# Altium PCB display-board.PcbDoc
Units mm, origin at the board's own origin, x right, y up, seen from the top; angles counter-clockwise.
Board outline 43.74 x 11.2 mm, 4 copper layers (Top Layer, Int1 (GND), Int2 (PWR), Bottom Layer), stack 1.369 mm thick; 12 components, 18 nets, 89 pads, 61 vias.
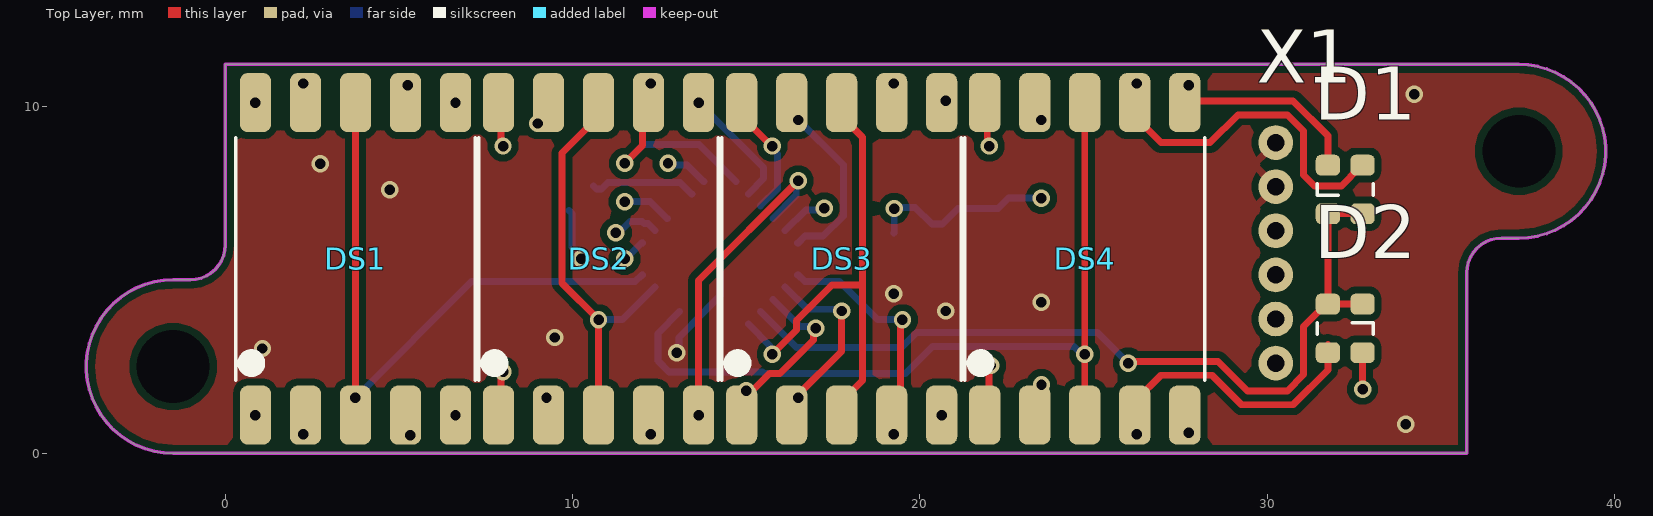
[diagram p0: Top Layer view]
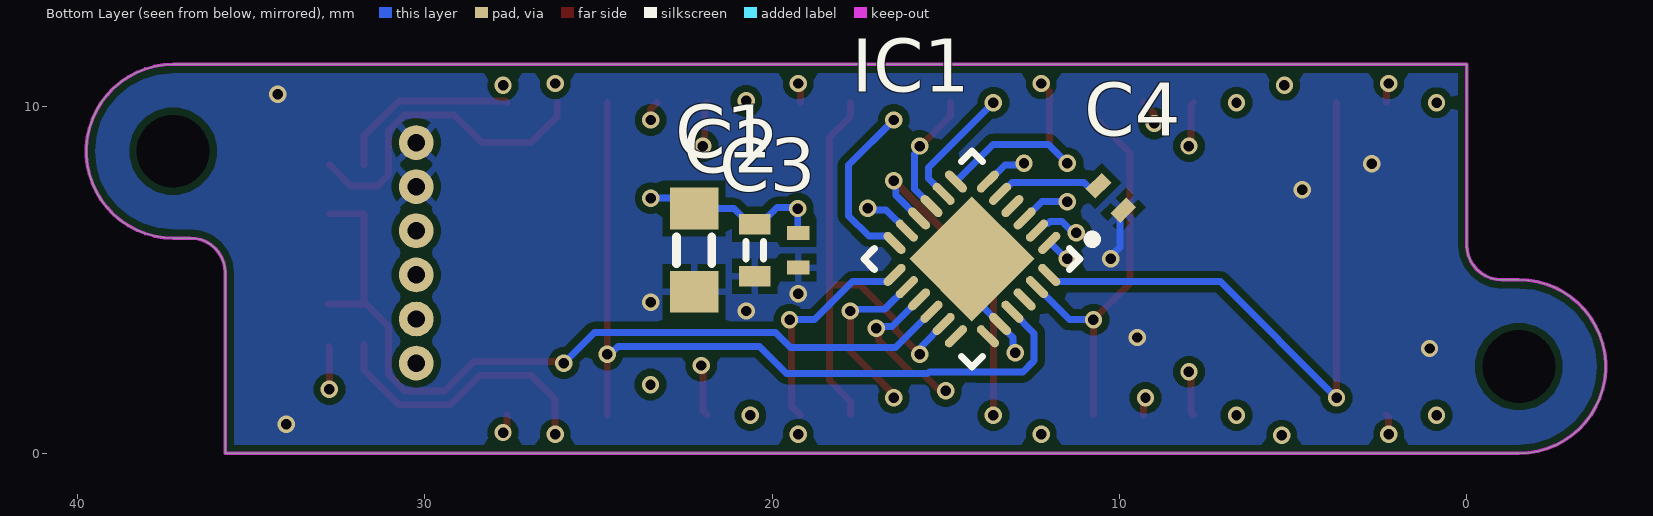
[diagram p1: Bottom Layer view, seen from below]
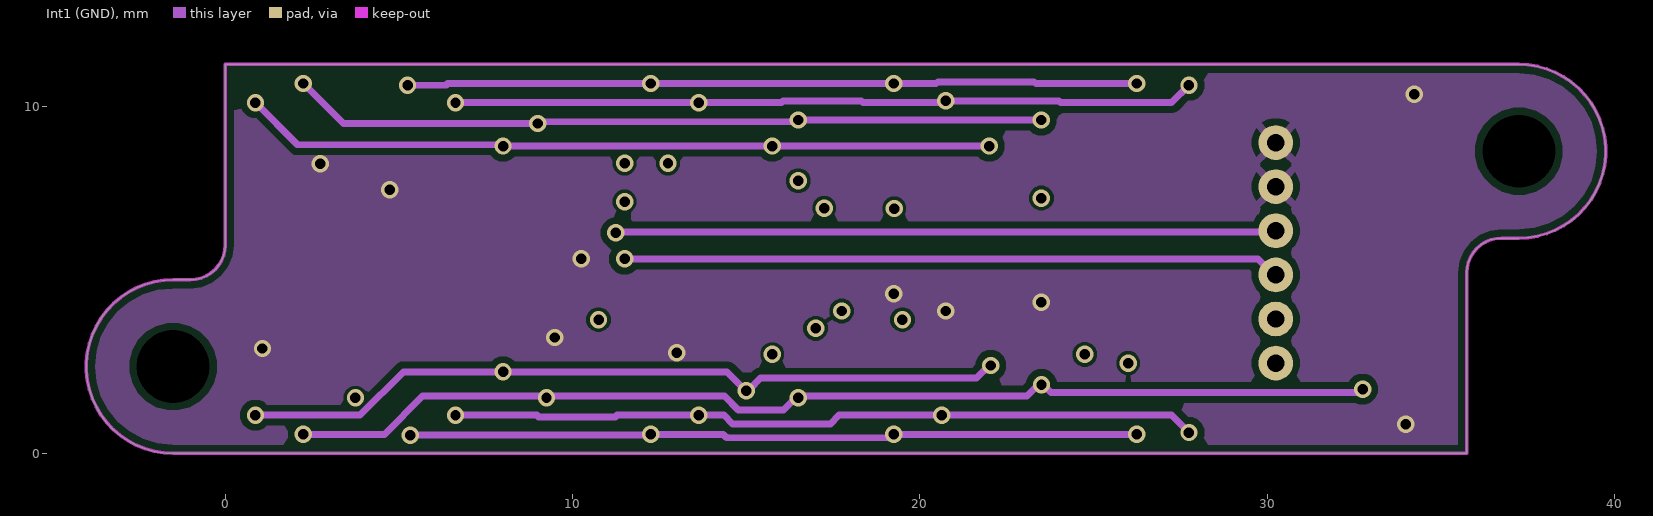
[diagram p2: Int1 (GND)]
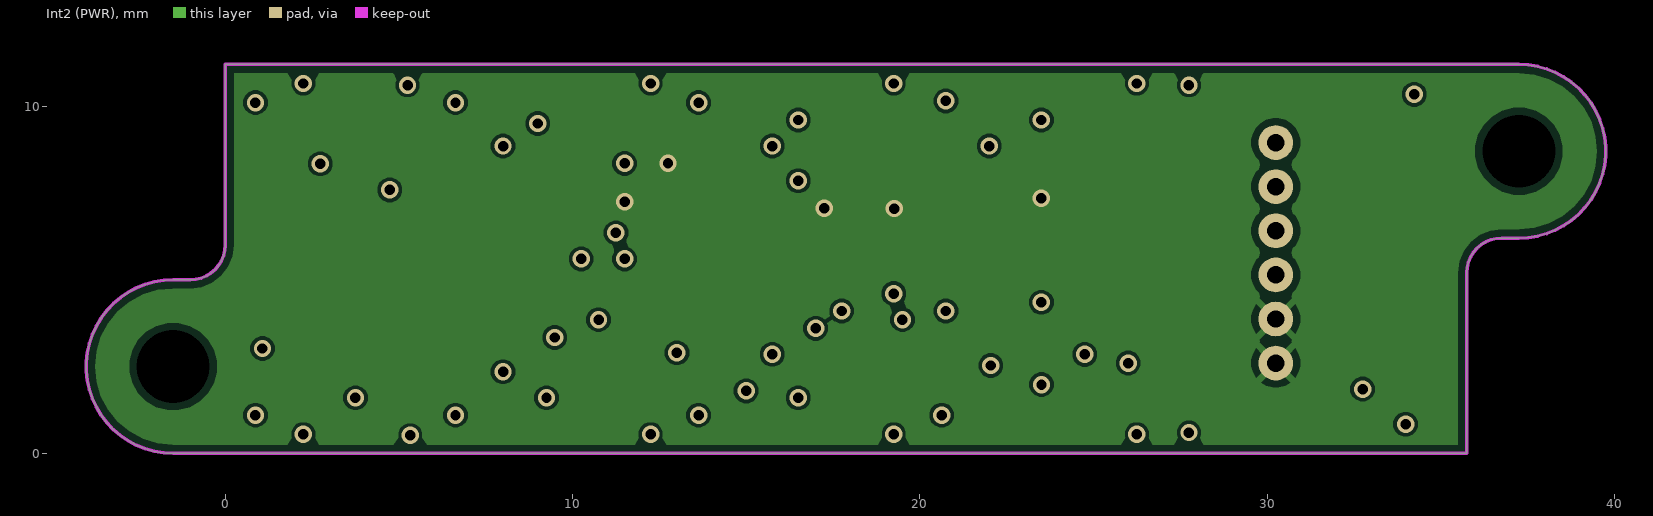
[diagram p3: Int2 (PWR)]
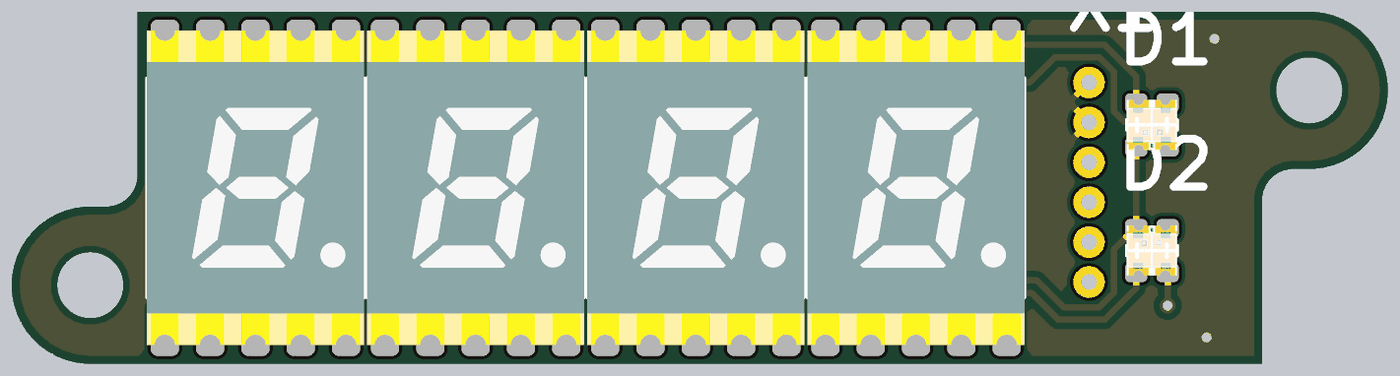
[diagram p4: 3D render of the assembled board from above, using the file's embedded part models]
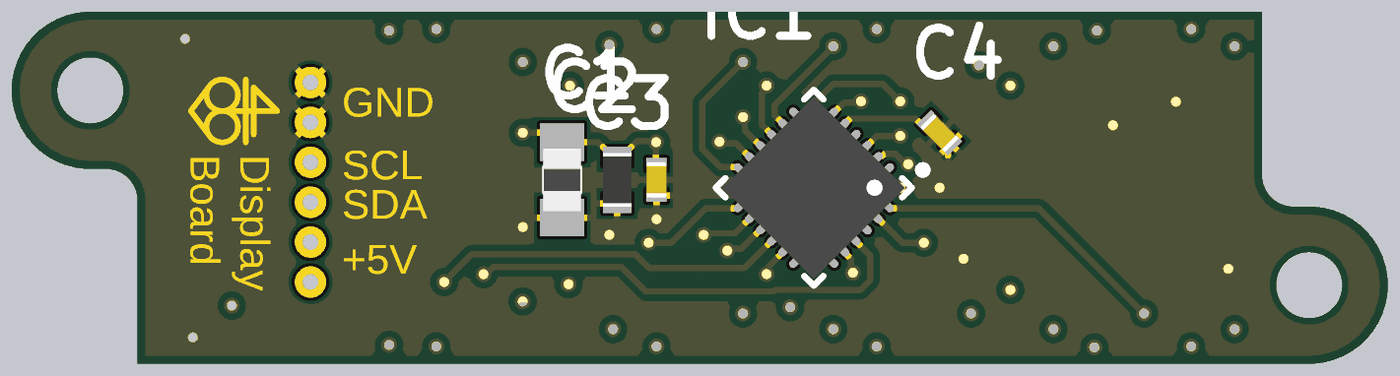
[diagram p5: 3D render of the assembled board from below, using the file's embedded part models]

## Layer stack, top to bottom
Top Solder: solder mask 0.0254, SM-001, Dk 4
Top Layer: signal copper 0.035
Dielectric 1: prepreg 0.1295, PP-017, Dk 4.3
Dielectric 2: prepreg 0.1295, PP-017, Dk 4.3
Int1 (GND): signal copper 0.035
Dielectric 3: core 0.7112, Core-039, Dk 4.8
Int2 (PWR): signal copper 0.035
Dielectric 4: prepreg 0.1295, PP-017, Dk 4.3
Dielectric 5: prepreg 0.1295, PP-017, Dk 4.3
Bottom Layer: signal copper 0.035
Bottom Solder: solder mask 0.0254, SM-001, Dk 4

## Board outline
-1.5,0 cw(c-1.5,2.5) -1.5,5 -1,5 ccw(c-1,6) 0,6 0,11.2 37.25,11.2 cw(c37.25,8.7) 37.25,6.2 36.75,6.2 ccw(c36.75,5.2) 35.75,5.2 35.75,0 -0.5,0

## Design rules (kind name [scope] priority, off if disabled: settings)
Clearance [All] p1: gap=0.2 ignorepadtopadclearanceinfootprint=FALSE
PolygonConnect [All] p1: thpad.connectstyle=Relief thpad.reliefconductorwidth=0.2 thpad.reliefentries=4 thpad.polygonreliefangle="90 Angle" thpad.airgapwidth=0.2 thpad.conductorbypadedge=TRUE thpad.mindistance=0.381 thpad.enablemindistance=FALSE smdpad.connectstyle=Relief smdpad.reliefconductorwidth=0.2 smdpad.reliefentries=4 smdpad.polygonreliefangle="90 Angle" smdpad.airgapwidth=0.2 smdpad.conductorbypadedge=TRUE smdpad.mindistance=0.381 smdpad.enablemindistance=FALSE via.connectstyle=Direct via.reliefconductorwidth=0.254 via.reliefentries=4 via.polygonreliefangle="90 Angle" via.airgapwidth=0.254
RoutingVias [All] p1: holewidth=0.3 width=0.5 viastyle="Through Hole" minholewidth=0.3 minwidth=0.5 maxholewidth=0.3 maxwidth=0.5
SolderMaskExpansion [All] p1: expansion=0.102 istentingtop=FALSE
SupplyNets "Schematic Supply Nets_3" [InNet('+5')] p1: voltage=0.000
SupplyNets "Schematic Supply Nets_1" [InNet('GND')] p2: voltage=0.000
Width [All] p1: maxlimit=1 minlimit=0.2 preferedwidth=0.25 checkconnectedcopper=TRUE
30 further rules are at their usual default settings.

## Components (designator, comment, footprint, x,y, rotation, side; value= is the part's Value field where it differs from the comment)
C1 "4u7F" 0805 22.25,5.85 r90 bottom
C2 "1u" 0603 20.5,5.85 r90 bottom
C3 "100n" CAP0402 19.25,5.85 r90 bottom
C4 "100n" CAP0402 10.25,7.35 r225 bottom
D1 "150066RG74000" 150066RG74000 32.25,7.6 r90 top
D2 "150066RG74000" 150066RG74000 32.25,3.6 r270 top
DS1 "ACSC02-41SURKWA-F01" ACSC02-41SURKWA-F01 3.75,5.6 r0 top locked
DS2 "ACSC02-41SURKWA-F01" ACSC02-41SURKWA-F01 10.75,5.6 r0 top locked
DS3 "ACSC02-41SURKWA-F01" ACSC02-41SURKWA-F01 17.75,5.6 r0 top locked
DS4 "ACSC02-41SURKWA-F01" ACSC02-41SURKWA-F01 24.75,5.6 r0 top locked
IC1 "IS31FL3728-QFLS2-TR" QFN24_4X4(IS31FL3728) 14.25,5.6 r315 bottom
X1 "3365A/06" 3M_CBL_RIBN_6X 30.25,2.6 r90 top

## Footprints (in the part's own frame and the unit in brackets; to place one, negate y for a bottom-side part, rotate by r counter-clockwise, add the part's x,y. Pads: shape width x height; smd on the part's side, far side on the other; paste and mask are expansions set on the pad)
3M_CBL_RIBN_6X [mm]
  round 1 hole 0.5: 1(0,0) 2(1.27,0) 3(2.54,0) 4(3.81,0) 5(5.08,0) 6(6.35,0)
0603 [mm]
  rect 0.6x0.9 smd: 1(-0.75,0) 2(0.75,0)
  silkscreen extent -0.25,-0.25 0.25,0.25, body extent -0.85,-0.45 0.85,0.45, height 0.55
0805 [mm]
  rect 1.2x1.4 smd: 1(-1.2,0) 2(1.2,0)
  silkscreen extent -0.38,-0.51 0.38,0.51, body extent -1,-0.6 1,0.6, height 0.7
150066RG74000 [mm] "LED GREEN/RED CLEAR 0606 SMD"
  rrect50% 0.6x0.7 smd: 1(-0.7,0.5) 2(-0.7,-0.5) 3(0.7,-0.5) 4(0.7,0.5)
  silkscreen extent -0.16,-0.81 0.16,0.81, body extent -0.8,-0.8 0.8,0.8, height 0.7
ACSC02-41SURKWA-F01 [mm] "DISPLAY 7-SEG 0.2\" SGL RED 10SMD"
  rrect50% 0.9x1.7 smd: 1(-2.88,-4.5) 2(-1.44,-4.5) 3(0,-4.5) 4(1.44,-4.5) 5(2.88,-4.5) 6(2.88,4.5) 7(1.44,4.5) 8(0,4.5) 9(-1.44,4.5) 10(-2.88,4.5)
  silkscreen extent -3.45,-3.5 3.45,3.5, body extent -3.45,-5 3.45,5, height 3.06
CAP0402 [mm] "Chip Capacitor, 2-Leads, Body 1.00x0.50mm, IPC Medium Density"
  rect 0.4x0.65 smd: 1(-0.5,0) 2(0.5,0)
  body extent -0.58,-0.33 0.58,0.33, height 0.65
QFN24_4X4(IS31FL3728) [mm] "QFN, 24-Leads, Body 4.00x4.00mm, Pitch 0.50mm, Thermal Pad 2.55x2.55mm, IPC Medium Density"
  oval 0.8x0.25 smd: 1(-1.9,1.25) 2(-1.9,0.75) 3(-1.9,0.25) 4(-1.9,-0.25) 5(-1.9,-0.75) 6(-1.9,-1.25) 13(1.9,-1.25) 14(1.9,-0.75) 15(1.9,-0.25) 16(1.9,0.25) 17(1.9,0.75) 18(1.9,1.25)
  oval 0.25x0.8 smd: 7(-1.25,-1.9) 8(-0.75,-1.9) 9(-0.25,-1.9) 10(0.25,-1.9) 11(0.75,-1.9) 12(1.25,-1.9) 19(1.25,1.9) 20(0.75,1.9) 21(0.25,1.9) 22(-0.25,1.9) 23(-0.75,1.9) 24(-1.25,1.9)
  rect 2.55x2.55 smd paste-2539.97: 25(0,0)
  silkscreen extent -2.97,-2.2 2.2,2.2, body extent -2.05,-2.05 2.05,2.05, height 0.8

## Part data
C1: library part 000090, Component Type=Standard, ComponentLink1Description=Datasheet, ComponentLink2Description="Manufacturer Site", Digikey Number=1276-1065-1-ND, Part Number=000090
C2: library part 000088, Component Type=Standard, ComponentLink1Description=Datasheet, ComponentLink2Description="Manufacturer Site", Part Number=000088
C3 C4: library part CL05A104KA5NNNC, MaxVoltage=25V, Tolerance=10%, Dialectric=X5R, MPN=CL05A104KA5NNNC
D1 D2: "Grün, Rot 520nm Grün, 625nm Rot LED-Indikator - Diskret 3,2V Grün, 2V Rot 0606 (1616 metrisch)"

## Free pads (board coordinates)
  round 1 hole 2.1 unplated: 0(-1.5,2.5) 0(37.25,8.7)

## Via types
v1: diameter 0.5, hole 0.3, Top Layer to Bottom Layer, tented both sides, 61 vias

## Nets (pads, with @x,y where several pads share a name; then routed paths per layer and width w, separated by ;. In a path a pad name is that pad's centre, name@x,y a point inside that pad or via, vN(x,y) a via of type N, cw(c..) or ccw(c..) an arc to the next point about the centre after c; other vN are vias at no path point)
+5: C1.2 C2.2 C3.2 IC1.3 IC1.6 IC1.11 X1.1 X1.2 | length 9.5
  Bottom Layer w0.2: v1(11.5,7.25) 12.233,7.25 12.716,6.767 IC1.3 ; v1(12.75,8.35) 12.796,8.304 13.3,8.304 13.777,7.827 IC1.6 ; IC1.11 16.717,7.007 17.193,7.007 v1(17.25,7.064) ; C3.2 19.264,6.364 v1(19.264,7.05) 19.297,7.083 19.867,7.083 20.35,6.6 20.65,6.6 21.1,7.05 C1.2 22.55,7.35 v1(23.5,7.35)
C1: DS1.3 DS1.8 IC1.24 | length 18.2
  Top Layer w0.2: v1(3.75,1.6) DS1.8
  Bottom Layer w0.2: v1(3.75,1.6) 7.096,4.946 11.805,4.946 12,5.14 IC1.24
C2: DS2.3 DS2.8 IC1.23 | length 11.9
  Top Layer w0.2: DS2.3 v1(10.75,3.85) 9.7,4.9 9.7,8.65 10.75,9.7 DS2.8
  Bottom Layer w0.2: v1(10.75,3.85) 11.439,3.85 IC1.23
C3: DS3.3 DS3.8 IC1.17 | length 14.2
  Top Layer w0.2: v1(15.75,2.852) 16.45,3.552 16.45,3.828 17.472,4.85 18.346,4.85 ; DS3.3 17.75,1.5 18.346,2.096 18.346,4.85 ; DS3.8 17.75,9.7 18.346,9.104 18.346,4.85
  Bottom Layer w0.2: IC1.17 15.693,3.097 15.693,2.91 v1(15.75,2.852)
C4: DS4.3 DS4.8 IC1.21 | length 23.5
  Top Layer w0.2: DS4.3 DS4.8
  Bottom Layer w0.2: IC1.21 12.456,3.452 12.456,2.668 12.778,2.346 14.124,2.346 14.128,2.35 15.474,2.35 15.522,2.302 19.59,2.302 20.369,3.081 24.437,3.081 24.669,2.85 v1(24.75,2.85)
C5: D1.1 D1.2 D2.1 D2.2 IC1.16 | length 24.1
  Top Layer w0.2: v1(26,2.6) 26.05,2.65 28.584,2.65 29.434,1.8 30.581,1.8 31.05,2.269 31.05,3.65 31.7,4.3 D2.2 ; D1.2 D1.1 D2.2 ; D2.1@32.773,4.3 D2.2
  Bottom Layer w0.2: IC1.16 16.446,3.05 19.478,3.05 19.909,3.481 25.119,3.481 v1(26,2.6)
GND: C1.1 C2.1 C3.1 C4.2 IC1.20 IC1.25 X1.5 X1.6 | length 4.8
  Bottom Layer w0.2: C4.2 9.985,6.908 9.985,5.946 10.25,5.681 v1(10.25,5.6) ; v1(13.006,2.896) 13.063,2.953 13.063,3.339 13.437,3.713 IC1.20 14.25,4.539 IC1.25
  other v1: 33.988,0.838 1.072,3.02 9.488,3.338 20.75,4.1 23.5,4.35 19.25,4.6 4.738,7.588 2.738,8.338 34.238,10.338
I2C_SCL: IC1.2 X1.4 | length 20.4
  Int1 (GND) w0.2: v1(11.25,6.35) 11.28,6.38 30.22,6.38 X1.4
  Bottom Layer w0.2: v1(11.25,6.35) 11.323,6.35 11.652,6.679 12.004,6.679 12.066,6.617 12.172,6.617 IC1.2
I2C_SDA: IC1.1 X1.3 | length 19.6
  Int1 (GND) w0.2: v1(11.5,5.6) 29.744,5.6 30.194,5.15 X1.3@30.24,5.15
  Bottom Layer w0.2: v1(11.5,5.6) 11.531,5.6 11.991,6.06 IC1.1
NetC4_1: C4.1 IC1.5 | length 3.1
  Bottom Layer w0.2: C4.1 10.692,7.615 10.833,7.615 11.018,7.8 13.097,7.8 13.423,7.474 IC1.5
R1: D1.3 DS1.7 DS2.7 DS3.7 DS4.7 IC1.7 | length 37.5
  Top Layer w0.2: v1(11.5,8.35) 12.019,8.869 12.019,10.419 v1(12.25,10.65) ; DS3.7 19.19,10.59 v1(19.25,10.65) ; DS4.7 26.19,9.7 26.94,8.95 28.361,8.95 29.161,9.75 30.581,9.75 31.05,9.281 31.05,8.014 31.364,7.7 32.136,7.7 32.4,7.964 32.4,7.973 32.727,8.3 D1.3
  Int1 (GND) w0.2: v1(5.25,10.6) 6.352,10.6 6.402,10.65 v1(12.25,10.65) ; v1@12.275,10.625 12.3,10.65 v1(19.25,10.65) ; v1@19.275,10.625 19.3,10.65 20.472,10.65 20.522,10.7 23.292,10.7 23.342,10.65 v1(26.25,10.65)
  Bottom Layer w0.2: v1(11.5,8.35) 12.05,8.9 13.637,8.9 IC1.7
R2: D1.4 DS1.6 DS2.6 DS3.6 DS4.6 IC1.8 | length 30.5
  Top Layer w0.2: DS3.6 20.68,10.15 v1(20.75,10.15) ; DS4.6 27.68,10.15 30.747,10.15 31.75,9.147 D1.4
  Int1 (GND) w0.2: v1(6.63,10.1) 16.015,10.1 16.065,10.15 18.313,10.15 18.363,10.1 20.7,10.1 v1(20.75,10.15) ; v1@20.8,10.15 24.004,10.15 24.054,10.1 27.25,10.1 v1(27.75,10.6)
  Bottom Layer w0.2: v1(13.63,10.1) 15.5,8.23 15.5,7.911 IC1.8
R3: D2.3 DS1.4 DS2.4 DS3.4 DS4.4 IC1.13 | length 35.7
  Top Layer w0.2: DS3.4 19.443,1.353 19.443,3.793 v1(19.5,3.85) ; v1(26.25,0.55) 26.25,1.56 26.94,2.25 28.419,2.25 29.269,1.4 30.747,1.4 31.75,2.403 D2.3@31.75,3.137
  Int1 (GND) w0.2: v1(5.329,0.521) 5.344,0.535 12.235,0.535 v1(12.25,0.55) ; v1@12.275,0.575 12.3,0.55 14.341,0.55 14.441,0.45 19.069,0.45 19.169,0.55 v1(19.25,0.55) ; v1@19.3,0.55 v1(26.25,0.55)
  Bottom Layer w0.2: IC1.13 16.5,5.14 16.695,4.946 17.682,4.946 18.778,3.85 v1(19.5,3.85)
R4: D2.4 DS1.2 DS2.2 DS3.2 DS4.2 IC1.14 | length 38.8
  Top Layer w0.2: v1(2.25,0.55) 2.25,1.04 DS1.2 ; v1(9.25,1.6) 9.31,1.54 DS2.2 ; v1(16.5,1.6) 16.5,1.69 17.75,2.94 v1(17.75,4.1) ; v1(32.75,1.85) 32.75,3.05 D2.4@32.775,3.075
  Int1 (GND) w0.2: v1(2.25,0.55) 4.581,0.55 5.681,1.65 9.2,1.65 v1(9.25,1.6) 9.3,1.65 14.372,1.65 14.772,1.25 16.072,1.25 16.422,1.6 v1(16.5,1.6) 16.55,1.65 23.092,1.65 v1@23.424,1.981 ; v1(23.505,1.981) 23.541,1.981 23.772,1.75 32.569,1.75 32.669,1.85 v1(32.75,1.85)
  Bottom Layer w0.2: IC1.14 16.761,4.15 17.7,4.15 v1(17.75,4.1)
R5: DS1.1 DS2.1 DS3.1 DS4.1 IC1.15 | length 29.4
  Top Layer w0.2: DS2.1 7.943,1.173 7.943,2.293 v1(8,2.35) ; v1(15,1.8) 15.008,1.807 15.177,1.807 15.672,2.302 15.978,2.302 16.943,3.267 16.943,3.543 v1(17,3.6) ; DS4.1 21.988,1.218 21.988,2.474 v1(22.046,2.531)
  Int1 (GND) w0.2: v1(0.87,1.1) 3.886,1.1 5.136,2.35 v1(8,2.35) 8.004,2.346 14.454,2.346 v1(15,1.8) ; v1@15.057,1.857 15.104,1.857 15.412,2.166 21.634,2.166 21.999,2.531 v1(22.046,2.531)
  Bottom Layer w0.2: IC1.15 16.546,3.657 16.943,3.657 v1(17,3.6)
R6: DS1.9 DS2.9 DS3.9 DS4.9 IC1.12 | length 28.6
  Top Layer w0.2: v1(2.25,10.65) 2.31,10.59 DS1.9 ; v1(9,9.5) 9,9.79 DS2.9 ; DS4.9 23.5,9.91 v1(23.5,9.6)
  Int1 (GND) w0.2: v1(2.25,10.65) 3.4,9.5 v1(9,9.5) 9.05,9.55 16.45,9.55 v1(16.5,9.6) v1(23.5,9.6)
  Bottom Layer w0.2: IC1.12 16.5,6.06 16.695,6.254 17.218,6.254 17.8,6.836 17.8,8.3 v1(16.5,9.6)
R7: DS1.10 DS2.10 DS3.10 DS4.10 IC1.9 | length 27.9
  Top Layer w0.2: DS2.10 7.943,10.027 7.943,8.907 v1(8,8.85) ; DS3.10 14.87,9.715 15.735,8.85 v1(15.75,8.85) ; DS4.10 21.943,10.027 21.943,8.907 v1(22,8.85)
  Int1 (GND) w0.2: v1(0.87,10.1) 2.082,8.888 7.962,8.888 v1(8,8.85) v1(22,8.85)
  Bottom Layer w0.2: IC1.9 15.417,7.134 15.9,7.617 15.9,8.619 15.75,8.769 v1(15.75,8.85)
R8: DS1.5 DS2.5 DS3.5 DS4.5 IC1.10 | length 31.4
  Top Layer w0.2: v1(13.63,1.1) 13.63,4.98 v1(16.5,7.85) ; DS4.5 27.63,0.72 v1(27.75,0.6)
  Int1 (GND) w0.2: v1(6.63,1.1) 8.972,1.1 9.022,1.05 11.232,1.05 11.282,1.1 14.357,1.1 14.606,0.85 17.424,0.85 17.674,1.1 27.25,1.1 v1(27.75,0.6)
  Bottom Layer w0.2: IC1.10 16.443,7.439 16.443,7.793 v1(16.5,7.85)
  other v1: 20.63,1.1
pads on no net: IC1.4 IC1.18 IC1.19 IC1.22

## Polygon pours and split planes (outlines as drawn)
GND on Top Layer "GND_L01_P001" (solid, remove dead copper, pour order 1): -1.5,0 cw(c-1.5,2.5) -1.5,5 -1,5 ccw(c-1,6) 0,6 0,11.2 37.25,11.2 cw(c37.25,8.7) 37.25,6.2 36.75,6.2 ccw(c36.75,5.2) 35.75,5.2 35.75,0 -0.5,0
+5 on Int2 (PWR) "+5_L03_P000" (solid, remove dead copper, pour order 0): -1.5,0 cw(c-1.5,2.5) -1.5,5 -1,5 ccw(c-1,6) 0,6 0,11.2 37.25,11.2 cw(c37.25,8.7) 37.25,6.2 36.75,6.2 ccw(c36.75,5.2) 35.75,5.2 35.75,0 -0.5,0
GND on Int1 (GND) "GND_L02_P002" (solid, remove dead copper, pour order 2): -1.5,0 cw(c-1.5,2.5) -1.5,5 -1,5 ccw(c-1,6) 0,6 0,11.2 37.25,11.2 cw(c37.25,8.7) 37.25,6.2 36.75,6.2 ccw(c36.75,5.2) 35.75,5.2 35.75,0 -0.5,0
GND on Bottom Layer "GND_L04_P003" (solid, remove dead copper, pour order 3): -1.5,0 cw(c-1.5,2.5) -1.5,5 -1,5 ccw(c-1,6) 0,6 0,11.2 37.25,11.2 cw(c37.25,8.7) 37.25,6.2 36.75,6.2 ccw(c36.75,5.2) 35.75,5.2 35.75,0 -0.5,0

## Keep-outs
Keep-Out Layer:
  the board outline again, w0.1

## Silkscreen, mask and mechanical layers (free items; w line width, h text height)
Bottom Solder:
  circle w0.175: c33.056,8.544 r0.5
  circle w0.175: c33.056,7.544 r0.5
  lines w0.175: 32.056,7.294 32.056,8.044 32.056,8.794 31.306,8.044 33.056,8.044 ; 32.306,7.044 32.306,8.044 32.306,9.044 ; 33.473,7.268 34.056,8.044 33.473,8.819
  text "GND" at 29.25,7.867 h1.5
  text "Display / Board" at 34.25,6.6 h1.5 r90
  text "SCL" at 29.25,5.867 h1.5
  text "SDA" at 29.25,4.617 h1.5
  text "+5V" at 29.25,2.867 h1.5
Mechanical 1:
  the board outline again, w0.1